# EAGLE board smd-adapter-dual (EAGLE 6.4)
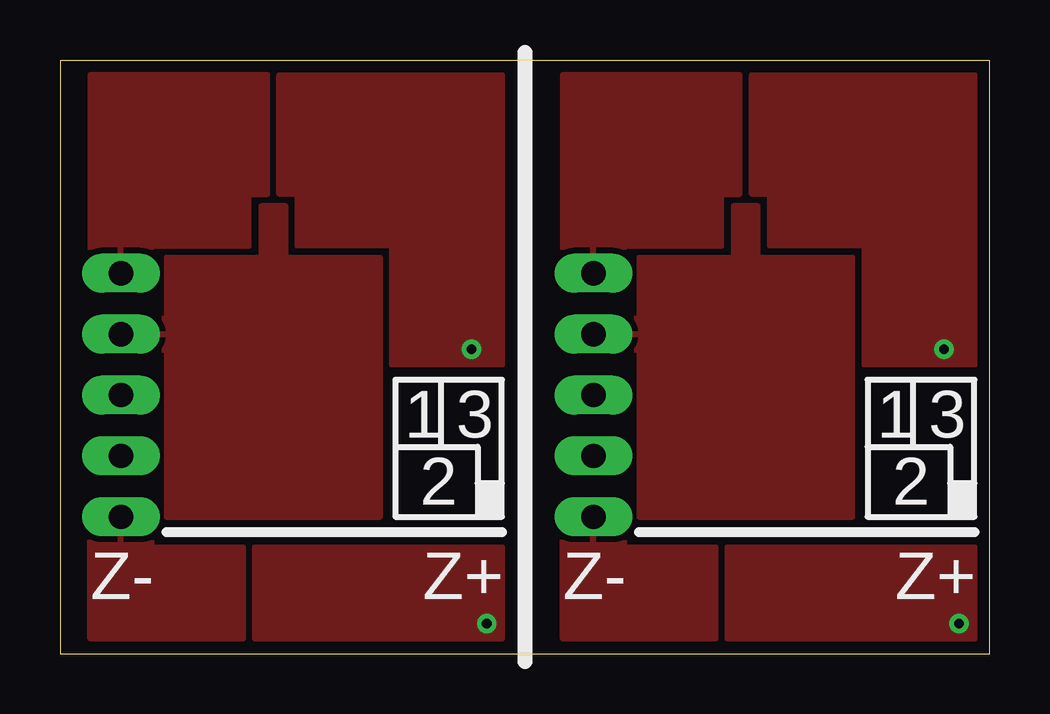
[diagram p0: board, top side]
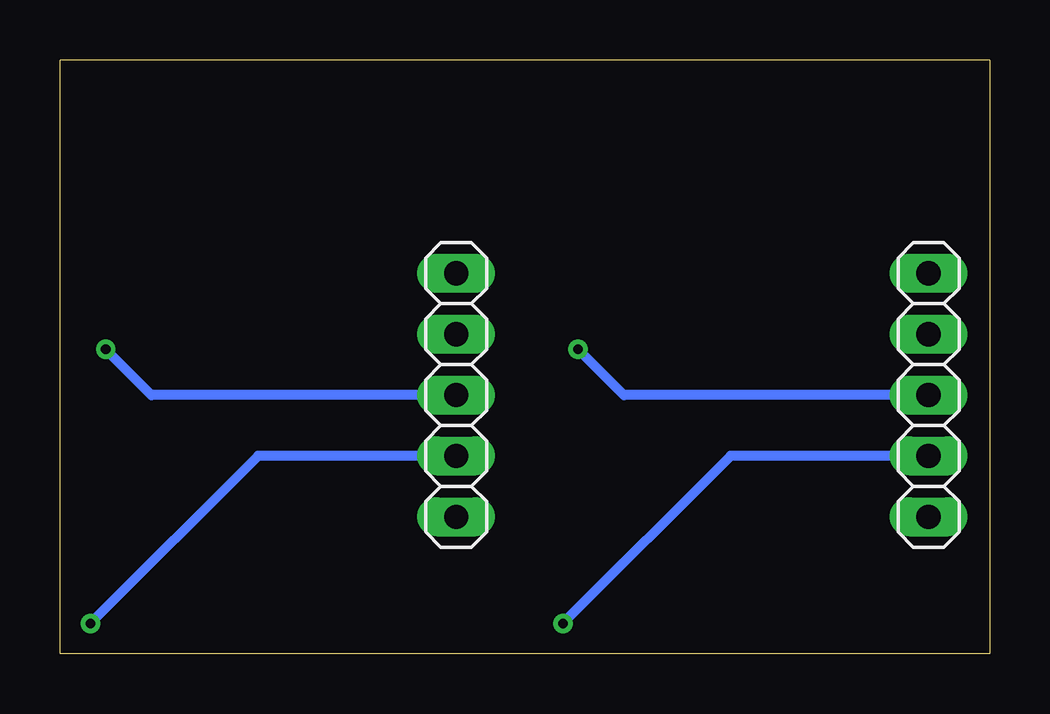
[diagram p1: board, bottom side, seen from below]

Size 38.73 x 24.77 mm. Coordinates in mm from the lower left corner, seen from the top.
Outline: 0,24.77 38.73,24.77 38.73,0 0,0 0,24.77
Copper layers (1*16): Top 0.035mm / dielectric 1.5mm / Bottom 0.035mm
Design rules "DFRobot_Eagle_Rule_v0.4": minimum track width 6mil, minimum drill 12mil, track to track 6mil, track to pad 6mil, pad to pad 6mil, via to via 6mil, smd to smd 0mil, copper to edge 10mil, drill to drill 10mil, minimum pad ring 12mil, minimum via ring 8mil, stop-mask expansion 2mil, vias tented up to drill 25mil, thermal gap 10mil

## Footprints (pad centres in the part's own frame; a part is rotated, then mirrored left to right if it is on the bottom)
1X05 = drill 1.016 long: 1 -5.08,0; 2 -2.54,0; 3 0,0; 4 2.54,0; 5 5.08,0

## Placement (x,y rotation side)
JP1  TESTSMD  [1X05]  22.23,10.79 270 bottom
JP5  TESTSMD  [1X05]  2.54,10.79 270 bottom

## Library data of the parts
JP1 JP5 = pinhead; REICHELT: AW 122/xx

## Nets
TEST1: JP5.1
TEST2: JP5.2
TEST3: JP5.3
TEST4: JP1.3
TEST5: JP1.2
TEST6: JP1.1
TESTZ+: JP5.4
TESTZ+1: JP1.4
TESTZ-: JP5.5
TESTZ-1: JP1.5

## Tracks (layer width: path | path; a pad name or v marks a point on that pad's centre or on a via)
TEST1
  pour Top: 1.27,15.24 3.81,15.24 3.81,17.02 7.87,17.02 7.87,19.18 8.64,19.18 8.64,24.13 1.27,24.13
TEST2
  pour Top: 1.27,13.97 1.27,12.7 4.45,12.7 4.45,5.71 13.34,5.71 13.34,16.51 9.4,16.51 9.4,18.67 8.38,18.67 8.38,16.51 4.45,16.51 4.45,13.97
TEST3  (via drill 0.4)
  Bottom 0.406: JP5.3 15.24,10.79 v17.14,12.7
  pour Top: 13.84,17.02 9.91,17.02 9.91,19.18 9.14,19.18 9.14,24.13 18.41,24.13 18.41,12.06 13.84,12.06
TEST4  (via drill 0.4)
  Bottom 0.406: JP1.3 34.92,10.79 v36.83,12.7
  pour Top: 33.53,17.02 29.59,17.02 29.59,19.18 28.83,19.18 28.83,24.13 38.1,24.13 38.1,12.06 33.53,12.06
TEST5
  pour Top: 20.95,13.97 20.95,12.7 24.13,12.7 24.13,5.71 33.02,5.71 33.02,16.51 29.08,16.51 29.08,18.67 28.07,18.67 28.07,16.51 24.13,16.51 24.13,13.97
TEST6
  pour Top: 20.95,15.24 23.5,15.24 23.5,17.02 27.56,17.02 27.56,19.18 28.32,19.18 28.32,24.13 20.95,24.13
TESTZ+  (via drill 0.4)
  Bottom 0.406: JP5.4 10.79,8.26 v17.78,1.27
  pour Top: 8.13,4.45 18.41,4.45 18.41,0.64 8.13,0.64
TESTZ+1  (via drill 0.4)
  Bottom 0.406: JP1.4 30.48,8.26 v37.47,1.27
  pour Top: 27.81,4.45 38.1,4.45 38.1,0.64 27.81,0.64
TESTZ-
  pour Top: 1.27,0.64 1.27,5.71 3.81,5.71 3.81,4.45 7.62,4.45 7.62,0.64
TESTZ-1
  pour Top: 20.95,0.64 20.95,5.71 23.5,5.71 23.5,4.45 27.3,4.45 27.3,0.64

## Text on the board
tNames: 1 | 3 | 1 | 3 | 2 | 2 | Z- | Z+ | Z- | Z+